# EAGLE board UartWifiBoard (EAGLE 8.1.0)
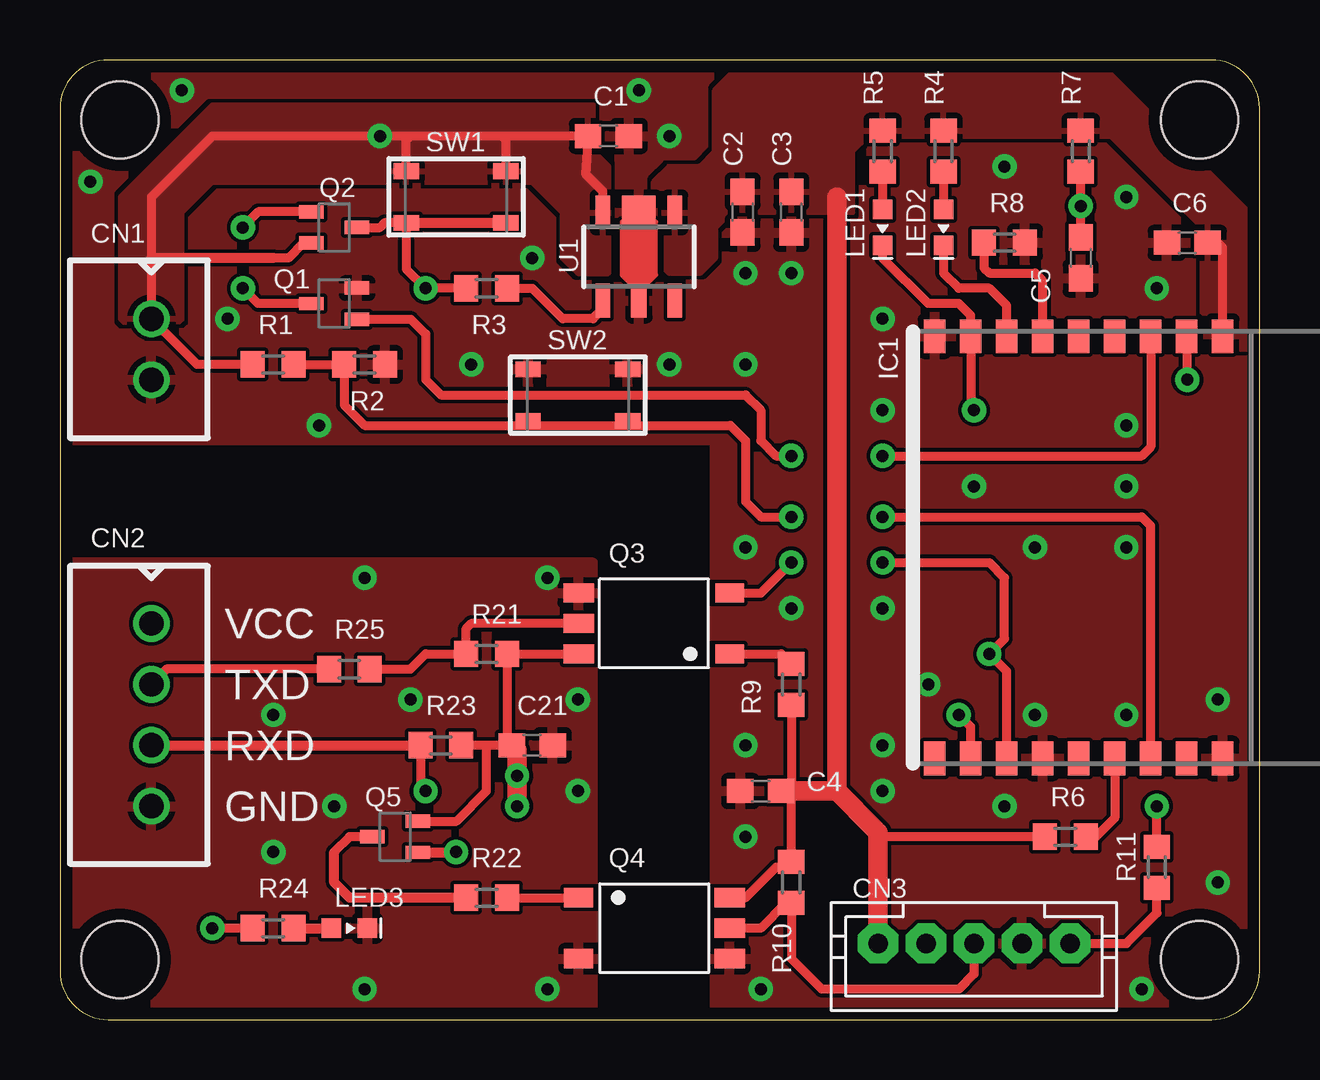
[diagram p0: board, top side]
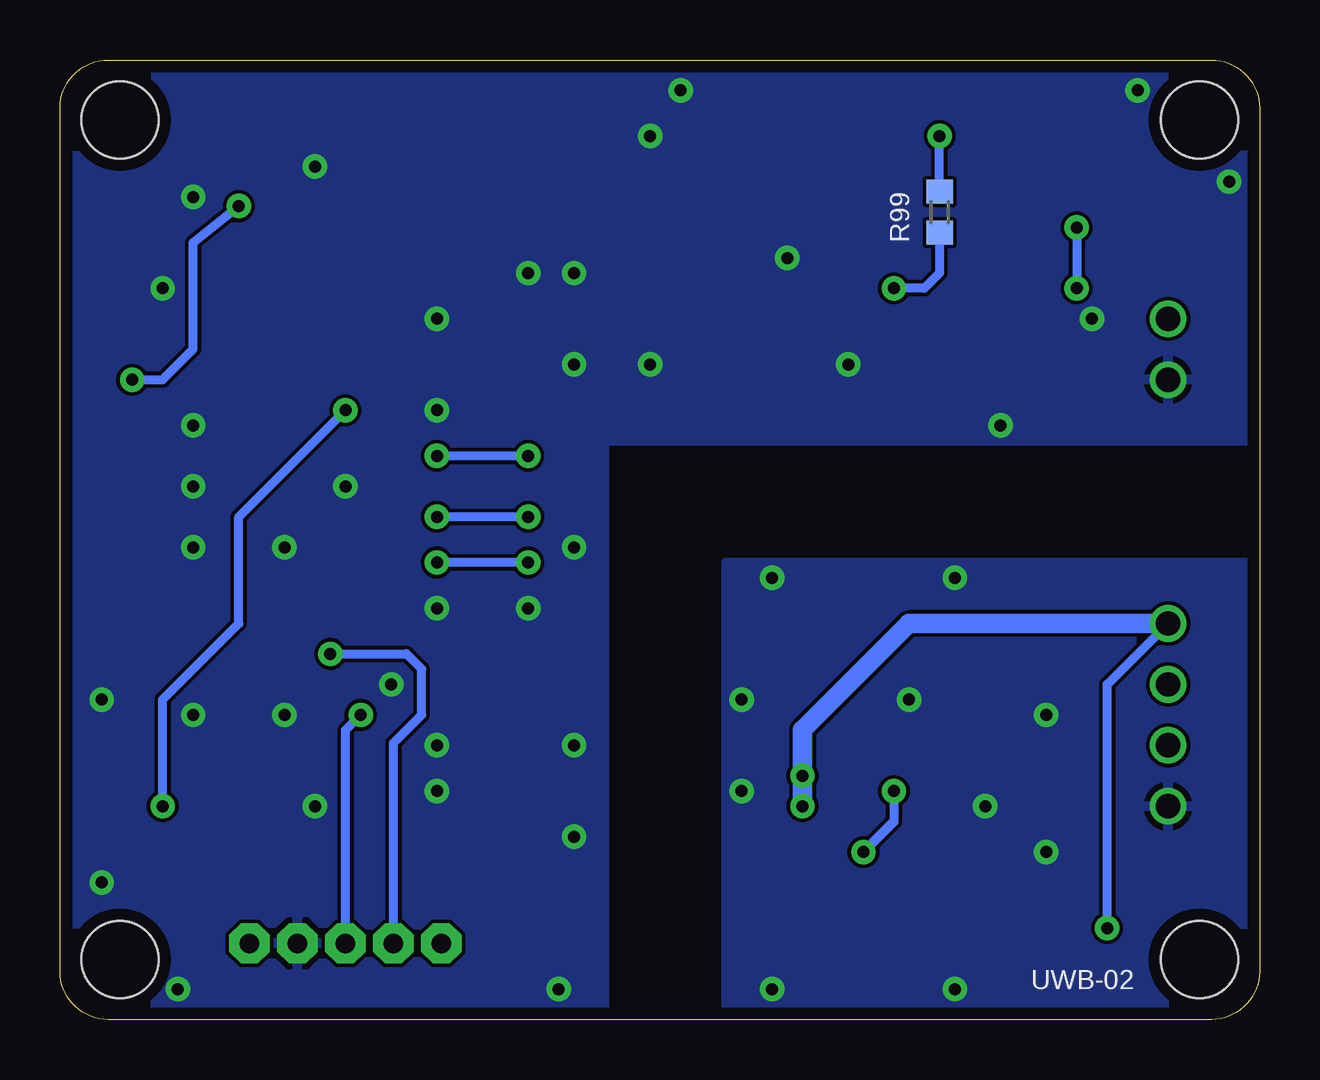
[diagram p1: board, bottom side, seen from below]

Size 50 x 40 mm. Coordinates in mm from the lower left corner, seen from the top.
Outline: 2,0 48,0 arc90 50,2 50,38 arc90 48,40 2,40 arc90 0,38 0,2 arc90 2,0
Copper layers (1*16): Top 0.035mm / dielectric 1.6mm / Bottom 0.035mm
Design rules "Elecrow_2-layer_PCB_eagle_rule": minimum track width 6mil, minimum drill 12mil, track to track 6mil, track to pad 6mil, pad to pad 6mil, via to via 8mil, smd to smd 0mil, copper to edge 20mil, drill to drill 10mil, minimum pad ring 6mil, minimum via ring 6mil, stop-mask expansion 0mil, vias tented up to drill 100mil, thermal gap 10mil
Holes 3.2 mm at 2.5,37.5 2.5,2.5 47.5,2.5 47.5,37.5

## Footprints (pad centres in the part's own frame; a part is rotated, then mirrored left to right if it is on the bottom)
C0603 = smd 1.1 x 1: 1 -0.85,0; 2 0.85,0
B2B-XH = drill 1.016: 1 1.27,0; 2 -1.27,0
B4B-XH = drill 1.016: 1 3.81,0; 2 1.27,0; 3 -1.27,0; 4 -3.81,0
B5B-PH = drill 0.813 pad 1.676 octagon: 1 4,0; 2 2,0; 3 0,0; 4 -2,0; 5 -4,0
ESP-WROOM-02 = smd 1.4 x 0.9: 1 -8.8,12.9; 2 -8.8,11.4; 3 -8.8,9.9; 4 -8.8,8.4; 5 -8.8,6.9; 6 -8.8,5.4; 7 -8.8,3.9; 8 -8.8,2.4; 9 -8.8,0.9; 10 8.8,0.9; 11 8.8,2.4; 12 8.8,3.9; 13 8.8,5.4; 14 8.8,6.9; 15 8.8,8.4; 16 8.8,9.9; 17 8.8,11.4; 18 8.8,12.9
1608SMD = smd 0.8 x 0.8: A -0.75,0; K 0.75,0
USM = smd 0.559 x 1.016: P$1 -0.65,-0.95; P$2 0.65,-0.95; P$3 0,0.95
SO6-5PIN = smd 0.8 x 1.2: 1 -1.27,-3.15; 3 1.27,-3.15 | smd 0.8 x 1.27: 4 1.27,3.15; 5 0,3.15; 6 -1.27,3.15
R0603 = smd 1 x 1.1: 1 -0.85,0; 2 0.85,0
SKRP = smd 1.05 x 0.65: 1 -2.075,1.075; 2 2.075,1.075; 3 -2.075,-1.075; 4 2.075,-1.075
SOT89-5 = smd 0.6 x 1.4: 1 -1.499,-1.781; 3 1.499,-1.781; 4 1.499,1.894; 6 -1.499,1.894 | smd 0.65 x 1.4: 2 0,-1.781 | smd 1.4 x 1.4: 5 0,1.894

## Placement (x,y rotation side)
C1  1.0u  [C0603]  22.86,36.83 0 top
C2  1.0u  [C0603]  28.45,33.66 270 top
C3  1.0u  [C0603]  30.48,33.66 270 top
C4  0.1u  [C0603]  29.21,9.53 180 top
C5  0.1u  [C0603]  42.55,31.75 270 top
C6  0.1u  [C0603]  46.99,32.38 180 top
C21  0.1u  [C0603]  19.68,11.43 0 top
CN1  B2B-XH  [B2B-XH]  3.81,27.94 90 top
CN2  B4B-XH  [B4B-XH]  3.81,12.7 90 top
CN3  B5B-PH  [B5B-PH]  38.1,3.17 180 top
IC1  ESP-WROOM-02  [ESP-WROOM-02]  35.56,19.68 270 top
LED1  OSTG1608C1A  [1608SMD]  34.29,33.02 270 top
LED2  OSYL1608C1A  [1608SMD]  36.83,33.02 270 top
LED3  OSHR1608C1A  [1608SMD]  12.06,3.81 0 top
Q1  RN1302  [USM]  11.43,29.84 90 top
Q2  RN2302  [USM]  11.43,33.02 270 top
Q3  TLP2368  [SO6-5PIN]  24.77,16.51 90 top
Q4  TLP2368  [SO6-5PIN]  24.77,3.81 270 top
Q5  RN2302  [USM]  13.97,7.62 90 top
R1  10.0k  [R0603]  8.89,27.3 180 top
R2  1.0k  [R0603]  12.7,27.3 180 top
R3  220  [R0603]  17.78,30.48 0 top
R4  3.3k  [R0603]  36.83,36.2 90 top
R5  3.3k  [R0603]  34.29,36.2 90 top
R6  3.3k  [R0603]  41.91,7.62 180 top
R7  10.0k  [R0603]  42.55,36.2 90 top
R8  10.0k  [R0603]  39.37,32.38 180 top
R9  470  [R0603]  30.48,13.97 270 top
R10  1.0k  [R0603]  30.48,5.71 90 top
R11  220  [R0603]  45.72,6.35 270 top
R21  4.7k  [R0603]  17.78,15.24 0 top
R22  470  [R0603]  17.78,5.08 180 top
R23  3.3k  [R0603]  15.88,11.43 0 top
R24  3.3k  [R0603]  8.89,3.81 180 top
R25  220  [R0603]  12.06,14.61 0 top
R99  0ohm  [R0603]  13.34,33.66 270 bottom
SW1  SKRPACE010  [SKRP]  16.51,34.29 0 top
SW2  SKRPACE010  [SKRP]  21.59,26.04 180 top
U1  NJM2884U1  [SOT89-5]  24.13,31.75 0 top

## Library data of the parts
C1-C6 C21 R1-R11 R21-R25 R99 = rcl
CN1-CN3 = jst
IC1 = espressif
LED1-LED3 = optosupply
Q1-Q5 = toshiba
SW1 SW2 = alps
U1 = njrc

## Nets
IO0: IC1.8 LED1.K R11.1
IO2: IC1.7 LED2.K
IO14: IC1.3 Q1.P$1
N$1: Q1.P$3 Q2.P$1
N$2: R3.2 U1.1
N$3: C1.1 CN1.1 Q2.P$2 R1.2 R99.1 SW1.1 SW1.2 U1.6
N$4: Q5.P$3 R22.2
N$5: Q2.P$3 R3.1 R99.2 SW1.3 SW1.4
N$7: CN2.3 Q5.P$1 R23.1
N$8: Q4.1 R22.1
N$9: LED2.A R4.1
N$10: CN3.5 R11.2
N$11: Q3.5 R21.1 R25.2
N$12: CN2.2 R25.1
N$13: LED3.A R24.1
N$16: Q3.1 R9.1
N$18: IC1.6 R8.2
N$19: C5.1 IC1.2 R7.1
N$22: LED1.A R5.1
P+3V3: C2.1 C3.1 C4.1 C6.1 CN3.1 IC1.1 Q4.6 R4.2 R5.2 R6.2 R7.2 R9.2 R10.2 U1.4
PGND: C1.2 C2.2 C3.2 C4.2 C5.2 C6.2 CN1.2 CN3.4 IC1.9 IC1.13 IC1.18 Q1.P$2 Q4.4 R2.1 R8.1 SW2.3 SW2.4 U1.2 U1.5
RST: IC1.15 R6.1
RXD: CN3.3 IC1.11 Q4.5 R10.1
S+SUP: C21.1 CN2.1 Q3.6 Q5.P$2 R21.2 R23.2 R24.2
SGND: C21.2 CN2.4 LED3.K Q3.4 Q4.3
TOUT: IC1.16 R1.1 R2.2 SW2.1 SW2.2
TXD: CN3.2 IC1.12 Q3.3

## Tracks (layer width: path | path; a pad name or v marks a point on that pad's centre or on a via)
IO0  (via drill 0.5 pad 1.02)
  Top 0.381: v38.1,25.4 37.96,25.54 IC1.8 37.96,29.35 37.47,29.84 36.2,29.84 34.29,31.75 LED1.K | R11.1 v45.72,8.89
  Bottom 0.381: v38.1,25.4 42.55,20.95 42.55,16.51 45.72,13.34 v45.72,8.89
IO2
  Top 0.381: LED2.K 36.83,31.11 37.47,30.48 38.73,30.48 39.46,29.75 IC1.7
IO14  (via drill 0.5 pad 1.02)
  Top 0.381: v30.48,23.5 29.84,23.5 29.21,24.13 29.21,25.4 28.57,26.04 15.88,26.04 15.24,26.67 15.24,28.57 14.62,29.2 Q1.P$1 | v34.29,23.5 45.09,23.5 45.46,23.87 IC1.3
  Bottom 0.381: v30.48,23.5 v34.29,23.5
N$1  (via drill 0.5 pad 1.02)
  Top 0.381: Q2.P$1 8.27,33.67 v7.62,33.02 | Q1.P$3 8.26,29.84 v7.62,30.48
  Bottom 0.381: v7.62,33.02 v7.62,30.48
N$2
  Top 0.381: R3.2 19.68,30.48 20.95,29.21 22.23,29.21 22.63,29.62 U1.1
N$3  (via drill 0.5 pad 1.02)
  Top 0.381: 18.41,36.83 C1.1 21.91,35.24 22.63,34.52 U1.6 | 18.41,36.83 14.61,36.83 | 14.61,36.83 v13.34,36.83 6.35,36.83 3.81,34.29 3.81,31.75 CN1.1 5.71,27.3 R1.2 | SW1.1 14.44,36.66 14.61,36.83 | SW1.2 18.59,36.66 18.41,36.83 | Q2.P$2 10.14,32.37 9.53,31.75 8.89,31.75
  Top 0.406: 8.89,31.75 3.81,31.75
  Bottom 0.381: R99.1 v13.34,36.83
  pour Top (isolate 0.254): 3.17,28.57 4.45,28.57 5.08,29.21 5.08,33.66 6.35,34.92 19.68,34.92 20.95,33.66 20.95,31.75 21.59,31.11 22.86,31.11 22.86,35.56 22.23,36.2 22.23,38.1 6.35,38.1 2.54,34.29 2.54,29.21
N$4
  Top 0.381: Q5.P$3 12.06,7.62 11.43,6.99
  Top 0.406: R22.2 12.06,5.08 11.43,5.71 11.43,6.99
N$5  (via drill 0.5 pad 1.02)
  Top 0.381: Q2.P$3 13.34,33.02 13.53,33.22 SW1.3 14.44,31.29 v15.24,30.48 R3.1
  Top 0.406: SW1.3 SW1.4
  Bottom 0.381: R99.2 13.34,31.11 13.97,30.48 v15.24,30.48
N$7  (via drill 0.5 pad 1.02)
  Top 0.381: R23.1 15.03,9.74 v15.24,9.53
  Top 0.406: Q5.P$1 16.5,6.97 v16.51,6.99 | CN2.3 R23.1
  Bottom 0.381: v15.24,9.53 15.24,8.26
  Bottom 0.406: v16.51,6.99 15.24,8.26
N$8
  Top 0.381: R22.1 Q4.1
N$9
  Top 0.381: R4.1 LED2.A
N$10
  Top 0.381: CN3.5 44.45,3.17 45.72,4.45 R11.2
N$11
  Top 0.381: R25.2 14.61,14.61 15.24,15.24 R21.1 16.93,16.3 17.14,16.51 Q3.5
N$12
  Top 0.381: R25.1 4.45,14.61 CN2.2
N$13
  Top 0.406: R24.1 LED3.A
N$16
  Top 0.381: Q3.1 30.06,15.24 R9.1
N$18
  Top 0.381: IC1.6 40.96,30.8 40.64,31.11 38.73,31.11 38.52,31.33 R8.2
N$19  (via drill 0.5 pad 1.02)
  Top 0.381: C5.1 42.55,33.66 v42.55,33.91 R7.1 | IC1.2 46.96,26.7 v46.99,26.67
  Bottom 0.381: v46.99,26.67 45.72,26.67 44.45,27.94 44.45,32.38 v42.55,33.91
N$22
  Top 0.381: R5.1 LED1.A
P+3V3
  Top 0.381: IC1.1 48.46,32.19 48.26,32.38 C6.1 | R6.2 34.29,7.62 33.97,7.94 | R9.2 30.48,9.95 C4.1 30.48,9.11 R10.2 30.27,6.35 29.84,6.35 28.57,5.08 Q4.6
  Top 0.813: 32.38,9.53 C4.1 | 32.38,9.53 32.38,34.29 | CN3.1 34.1,7.81 33.97,7.94 32.38,9.53
  pour Top (isolate 0.254): 26.67,31.11 25.4,31.11 24.77,31.75 24.77,34.92 25.4,35.56 26.67,35.56 27.3,36.2 27.3,38.73 28.57,40.01 43.18,40.01 50.8,32.38 50.8,28.57 50.16,27.94 47.62,27.94 47.62,33.02 43.81,36.83 33.66,36.83 33.02,36.2 33.02,33.66 27.94,33.66 27.3,33.02 27.3,31.75
PGND  (via drill 0.5 pad 1.02)
  other vias: 39.37,35.56 17.14,27.3 25.4,27.3 25.4,36.83 44.45,34.29 5.08,38.73 28.57,11.43 28.57,7.62 34.29,9.53 40.64,19.68 48.26,5.71 38.1,22.23 44.45,22.23 44.45,19.68 44.45,24.77 44.45,12.7 34.29,11.43 10.79,24.77 30.48,17.14 28.57,27.3 28.57,31.11 30.48,31.11 29.21,1.27 34.29,17.14 48.26,13.34 1.27,34.92 19.68,31.75 6.99,29.21 24.13,38.73 28.57,19.68 36.2,13.97 40.64,12.7 34.29,29.21 34.29,25.4 45.72,30.48 45.09,1.27 39.37,8.89
  pour Bottom (rank 3): -2.54,42.55 52.7,42.55 52.7,-2.54 27.3,-2.54 27.3,24.13 -2.54,24.13
  pour Top (rank 3): -1.27,41.27 51.44,41.27 51.44,-1.27 27.3,-1.27 27.3,24.13 -1.27,24.13
RST
  Top 0.381: R6.1 43.18,7.62 43.96,8.4 IC1.15
RXD  (via drill 0.5 pad 1.02)
  Top 0.381: CN3.3 38.1,1.91 37.47,1.27 31.75,1.27 30.48,2.54 R10.1 30.27,4.87 29.21,3.81 Q4.5 | IC1.11 37.96,12.21 v37.47,12.7
  Bottom 0.381: CN3.3 38.1,12.06 v37.47,12.7
S+SUP  (via drill 0.5 pad 1.02)
  Top 0.381: Q5.P$2 16.52,8.27 17.78,9.53 17.78,11.43 | 17.78,11.43 R23.2 | C21.1 19.05,11.43 19.05,10.79 | C21.1 17.78,11.43 | Q3.6 R21.2 18.63,11.63 C21.1 | 19.05,11.21 C21.1 | R24.2 v6.35,3.81
  Top 0.813: v19.05,8.89 v19.05,10.16 19.05,10.79 19.05,11.21
  Bottom 0.381: v6.35,3.81 6.35,13.97 CN2.1
  Bottom 0.813: CN2.1 14.61,16.51 19.05,12.06 v19.05,8.89
SGND  (via drill 0.5 pad 1.02)
  other vias: 20.32,1.27 20.32,18.41 12.7,18.41 11.43,8.89 21.59,13.34 21.59,9.53 12.7,1.27 14.61,13.34 8.89,12.7 8.89,6.99
  pour Bottom (rank 3): 22.23,-2.54 22.23,19.05 -2.54,19.05 -2.54,-2.54
  pour Top (rank 3): 22.23,-1.27 22.23,19.05 -1.27,19.05 -1.27,-1.27
TOUT  (via drill 0.5 pad 1.02)
  Top 0.381: 19.68,24.77 12.7,24.77 11.85,25.61 R2.2 R1.1 | 19.68,24.77 23.5,24.77 | 23.5,24.77 27.94,24.77 28.57,24.13 28.57,21.59 29.21,20.95 v30.48,20.95 | v34.29,20.95 45.09,20.95 45.46,20.58 IC1.16 | SW2.2 19.52,24.93 19.68,24.77 | SW2.1 23.66,24.93 23.5,24.77
  Bottom 0.381: v30.48,20.95 v34.29,20.95
TXD  (via drill 0.5 pad 1.02)
  Top 0.381: v34.29,19.05 38.73,19.05 39.37,18.41 39.37,15.88 v38.73,15.24 39.46,14.52 IC1.12 | Q3.3 29.21,17.78 v30.48,19.05
  Bottom 0.381: v30.48,19.05 v34.29,19.05 | CN3.2 36.1,11.53 34.92,12.7 34.92,14.61 35.56,15.24 v38.73,15.24

## Text on the board
tPlace: VCC | TXD | RXD | GND
bPlace: UWB-02